# EAGLE board rx_out (EAGLE 7.6.0)
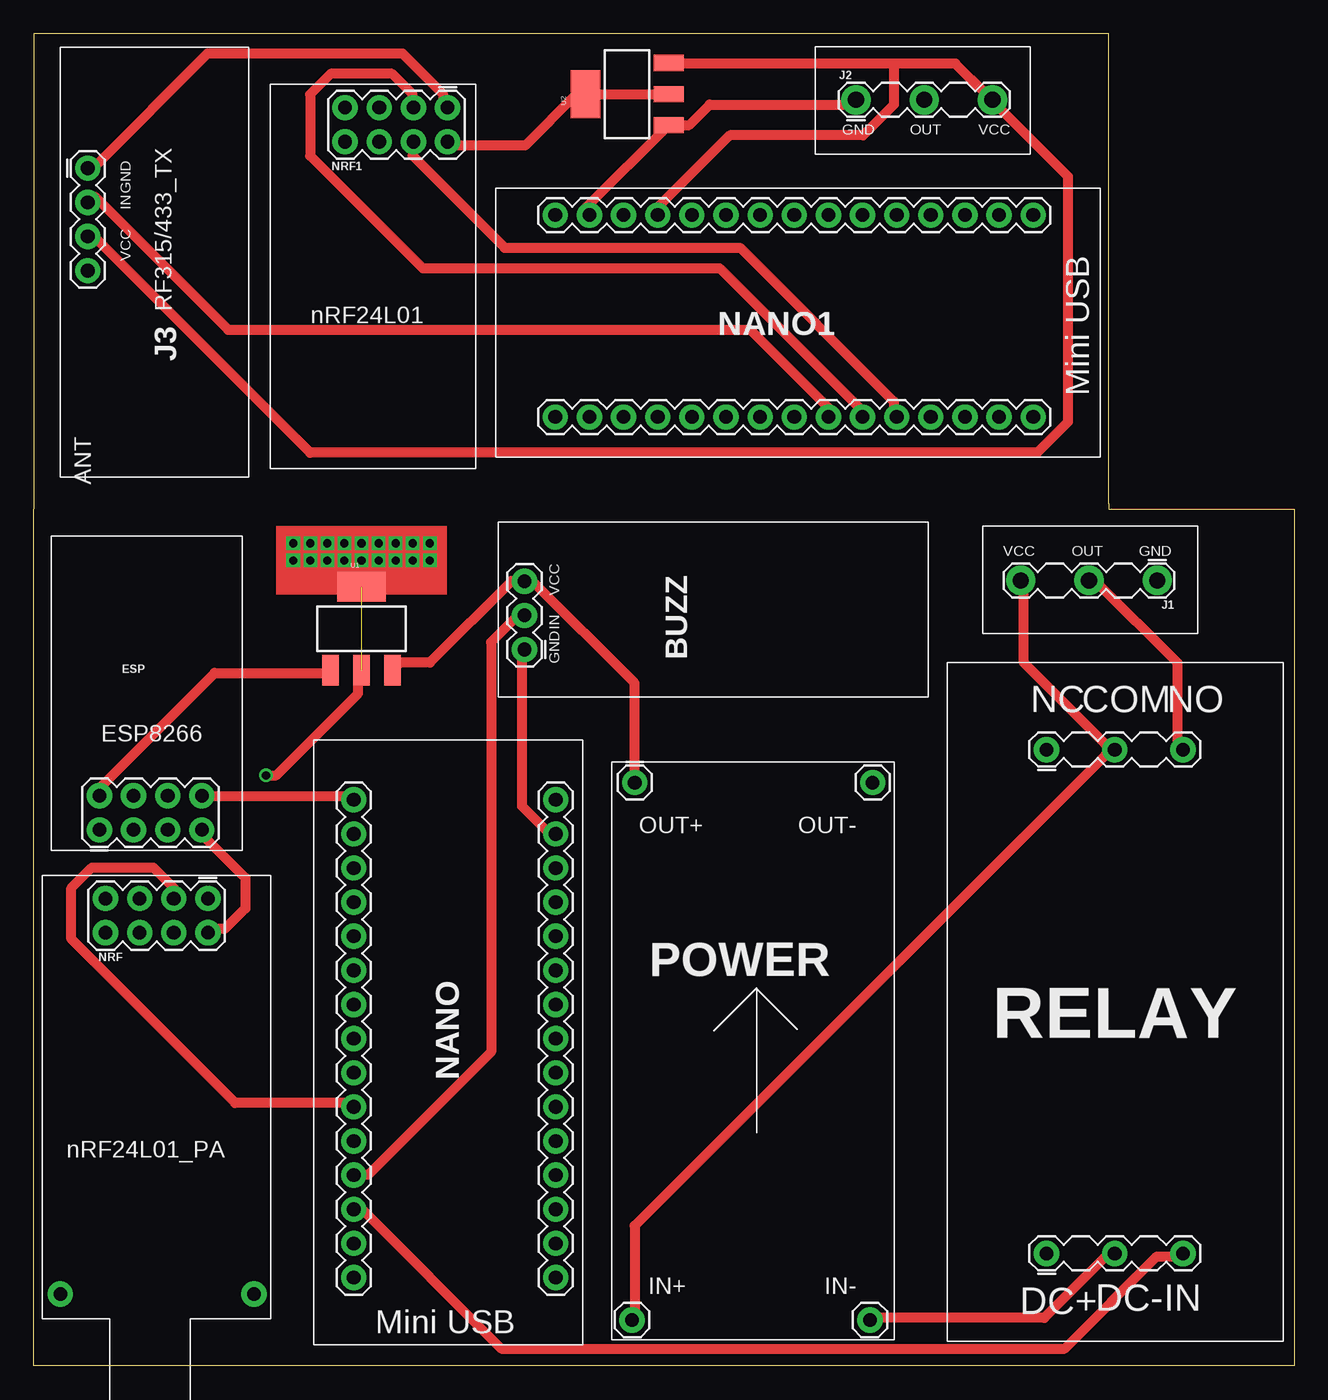
[diagram p0: board, top side]
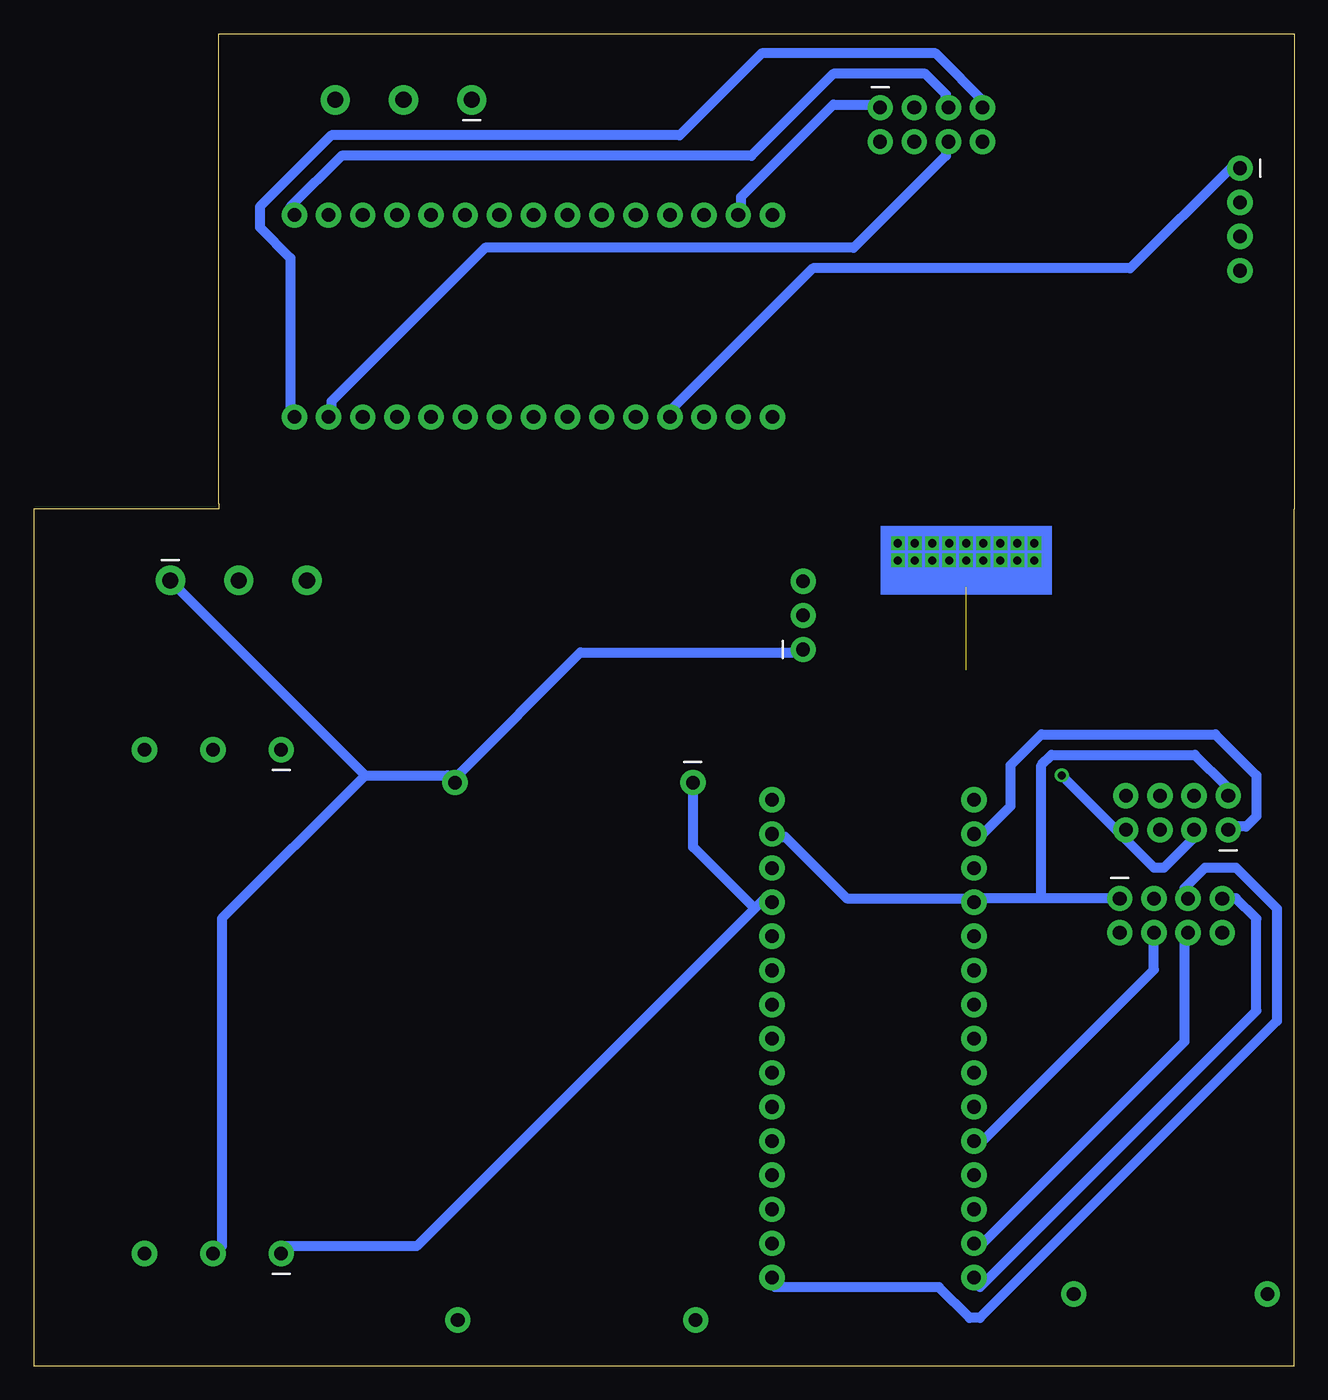
[diagram p1: board, bottom side, seen from below]

Size 93.79 x 99.17 mm. Coordinates in mm from the lower left corner, seen from the top.
Outline: 0,0 0,63.77 0,64.17 0,99.17 80,99.17 80,64.17 80,63.77 93.79,63.77 93.79,0 0,0
Copper layers (1*16): Top 0.035mm / dielectric 1.5mm / Bottom 0.035mm
Design rules "default": minimum track width 10mil, minimum drill 24mil, track to track 8mil, track to pad 8mil, pad to pad 8mil, via to via 8mil, smd to smd 8mil, copper to edge 40mil, drill to drill 8mil, minimum pad ring 10mil, minimum via ring 8mil, stop-mask expansion 4mil, vias tented up to drill 0mil, thermal gap 10mil

## Footprints (pad centres in the part's own frame; a part is rotated, then mirrored left to right if it is on the bottom)
BUZZ_MODULE = drill 1.016 pad 1.88: 1 3.52,-1.97; 3 6.06,-1.97; 5 8.6,-1.97
ESP8266 = drill 1.016 pad 1.88: 1 -10.61,1.53; 2 -10.61,4.07; 3 -8.07,1.53; 4 -8.07,4.07; 5 -5.53,1.53; 6 -5.53,4.07; 7 -2.99,1.53; 8 -2.99,4.07
OUT_HEAD_3_BIG = drill 1.2 pad 2.184: 1 3.02,4.03; 3 8.1,4.03; 5 13.18,4.03
315MHZ_TX = drill 1.016 pad 1.88: 1 9.02,2.03; 3 11.56,2.03; 5 14.1,2.03; 7 16.64,2.03
ARDUINO_NANO = drill 1.016 pad 1.88: 1 -10.2,-8.1; 2 -7.66,-8.1; 3 -5.12,-8.1; 4 -2.58,-8.1; 5 -0.04,-8.1; 6 2.5,-8.1; 7 5.04,-8.1; 8 7.58,-8.1; 9 10.12,-8.1; 10 12.66,-8.1; 11 15.2,-8.1; 12 17.74,-8.1; 13 20.28,-8.1; 14 22.82,-8.1; 15 25.36,-8.1; 16 -10.2,6.93; 17 -7.66,6.93; 18 -5.12,6.93; 19 -2.58,6.93; 20 -0.04,6.93; 21 2.5,6.93; 22 5.04,6.93; 23 7.58,6.93; 24 10.12,6.93; 25 12.66,6.93; 26 15.2,6.93; 27 17.74,6.93; 28 20.28,6.93; 29 22.82,6.93; 30 25.36,6.93
NRF24L01_PA = drill 1.016 pad 1.88: 1 -3.81,-15.47; 2 -3.81,-12.93; 3 -1.27,-15.47; 4 -1.27,-12.93; 5 1.27,-15.47; 6 1.27,-12.93; 7 3.81,-15.47; 8 3.81,-12.93; 9 7.17,13.97; 10 -7.23,13.97
NRF24L01 = drill 1.016 pad 1.88: 1 -13.21,1.73; 2 -13.21,4.27; 3 -10.67,1.73; 4 -10.67,4.27; 5 -8.13,1.73; 6 -8.13,4.27; 7 -5.59,1.73; 8 -5.59,4.27
POWER_REDUCE = drill 1.016 pad 1.88: 1 10.15,-20.29; 2 -7.55,-20.29; 3 10.35,19.71; 4 -7.35,19.71
RELAY_MODULE = drill 1.016 pad 1.88: 1 -4.91,-22.38; 2 0.17,-22.38; 3 5.25,-22.38; 4 -4.91,15.12; 5 0.17,15.12; 6 5.25,15.12
SOT223 = smd 1.219 x 2.235: 1 -2.311,-3.099; 2 0,-3.099; 3 2.311,-3.099 | smd 3.6 x 2.2: 4 0,3.099

## Placement (x,y rotation side)
BUZZ  [BUZZ_MODULE]  34.56,49.8 90 top
ESP  [ESP8266]  15.51,38.37 0 top
J1  [OUT_HEAD_3_BIG]  86.63,62.5 180 top
J2  [OUT_HEAD_3_BIG]  58.17,90.21 0 top
J3  [315MHZ_TX]  2,98.17 270 top
NANO  [ARDUINO_NANO]  30.75,16.78 90 top
NANO1  [ARDUINO_NANO]  64.18,77.56 180 top
NRF  [NRF24L01_PA]  9.16,19.32 180 top
NRF1  [NRF24L01]  17.59,95.39 180 top
POWER  [POWER_REDUCE]  54.88,23.13 180 top
RELAY  [RELAY_MODULE]  80.28,30.75 0 top
U1  [SOT223]  24.4,54.88 0 top
U2  [SOT223]  44.15,94.66 90 top

## Library data of the parts
BUZZ ESP J1-J3 NANO NANO1 NRF NRF1 POWER RELAY = rx
U1 U2 = rx; PROD_ID: VREG-08170

## Nets
+3.3V: ESP.3 ESP.7 NRF.2 U1.2 U1.4
+3.3V1: NRF1.2 U2.2 U2.4
+5V: BUZZ.5 NANO.12 POWER.1 RELAY.1 U1.3
+5V1: J2.5 J3.5 NANO1.12 U2.3
+12V: J1.5 POWER.3 RELAY.5
D1: NANO1.17 NRF1.6
D2: NANO1.20 NRF1.4
D3: NANO1.1 NRF1.5
D4: NANO1.21 NRF1.3
D5: NANO1.16 NRF1.7
D6: NANO1.18
D7: NANO.21 NRF.3
D8: NANO.20 NRF.4
D9: BUZZ.3 NANO.19
D10: NANO.18 RELAY.3
D11: NANO.17 NRF.6
D12: NANO.16 NRF.7
D13: NANO.1 NRF.5
D14: NANO1.19
D15: J3.3 NANO1.22
GND: BUZZ.1 ESP.2 J1.1 NANO.14 NANO.27 NRF.1 POWER.2 POWER.4 RELAY.2 U1.1
GND1: J2.1 J3.1 NANO1.14 NANO1.27 NRF1.1 U2.1
NANO_RX: ESP.1 NANO.29
NANO_RX1: NANO1.29
NANO_TX: ESP.8 NANO.30
NANO_TX1: NANO1.30
OUT: J1.3 RELAY.6
OUT1: J2.3

## Tracks (layer width: path | path; a pad name or v marks a point on that pad's centre or on a via)
+3.3V  (via drill 0.61)  (1 unrouted)
  Top 0.762: v17.29,43.96 18.05,43.96 24.15,50.05 24.15,51.58 U1.2 | NRF.2 13.48,32.53 14.24,32.53 15.76,34.05 15.76,36.34 12.72,39.39 ESP.7
  Bottom 0.762: 12.72,39.39 v17.29,43.96 | 12.72,39.39 10.43,37.1 9.67,37.1 7.38,39.39 ESP.3 | 12.72,39.39 ESP.7
+3.3V1
  Top 0.762: U2.2 41.15,94.65 U2.4 40.39,94.65 36.58,90.84 31.24,90.84 NRF1.2
+5V
  Top 0.762: U1.3 27.19,52.34 29.48,52.34 35.58,58.44 36.34,58.44 BUZZ.5 37.1,58.44 44.72,50.82 44.72,43.96 POWER.1
  Bottom 0.762: 40.15,34.05 39.39,34.81 NANO.12 | 40.15,34.05 65.29,8.91 75.2,8.91 RELAY.1 | 40.15,34.05 44.72,38.62 44.72,43.2 POWER.1
+5V1
  Top 0.762: 64.01,96.94 68.58,96.94 70.87,94.65 J2.5 71.63,93.89 76.96,88.55 76.96,70.27 74.68,67.98 20.57,67.98 4.57,83.98 J3.5 | 64.01,96.94 48.01,96.94 U2.3 | 64.01,96.94 64.01,93.89 61.72,91.6 51.82,91.6 46.48,86.27 NANO1.12
+12V
  Top 0.762: POWER.3 44.72,3.57 44.72,10.43 79.77,45.48 RELAY.5 79.77,46.24 73.68,52.34 73.68,58.44 J1.5
D1
  Bottom 0.762: NANO1.17 71.63,71.03 71.63,71.79 60.2,83.22 32.77,83.22 25.91,90.08 25.91,90.84 NRF1.6
D2
  Top 0.762: NANO1.20 64.01,71.03 64.01,71.79 52.58,83.22 35.05,83.22 28.19,90.08 28.19,90.84 NRF1.4
D3
  Bottom 0.762: NANO1.1 74.68,86.27 70.87,90.08 40.39,90.08 34.29,96.17 27.43,96.17 25.91,94.65 25.91,93.89 NRF1.5
D4
  Top 0.762: NANO1.21 61.72,71.03 51.05,81.7 28.96,81.7 20.57,90.08 20.57,94.65 22.1,96.17 26.67,96.17 28.19,94.65 28.19,93.89 NRF1.3
D5
  Bottom 0.762: NANO1.16 74.68,71.03 74.68,82.46 76.96,84.74 76.96,86.27 71.63,91.6 45.72,91.6 39.62,97.7 26.67,97.7 22.86,93.89 NRF1.7
D7
  Top 0.762: NRF.3 10.43,35.58 8.91,37.1 4.33,37.1 2.81,35.58 2.81,31.77 15,19.57 23.38,19.57 NANO.21
D8
  Bottom 0.762: NRF.4 10.43,29.48 23.38,16.53 NANO.20
D9
  Top 0.762: NANO.19 24.15,14.24 24.91,14.24 34.05,23.38 34.05,53.86 36.34,56.15 BUZZ.3
D10
  Top 0.762: RELAY.3 85.11,8.14 83.58,8.14 76.72,1.29 34.81,1.29 24.15,11.95 NANO.18
D11
  Bottom 0.762: NRF.6 8.14,31.77 8.14,24.15 23.38,8.91 NANO.17
D12
  Bottom 0.762: NRF.7 5.1,34.81 4.33,34.81 2.81,33.29 2.81,26.43 23.38,5.86 NANO.16
D13
  Bottom 0.762: NANO.1 38.62,5.86 26.43,5.86 24.15,3.57 23.38,3.57 1.29,25.67 1.29,34.05 4.33,37.1 6.62,37.1 8.14,35.58 8.14,34.81 NRF.5
D15
  Top 0.762: NANO1.22 59.44,71.03 53.34,77.12 14.48,77.12 4.57,87.03 J3.3
GND
  Top 0.762: U1.1 21.86,51.58 13.48,51.58 5.1,43.2 ESP.2 | NANO.14 38.62,39.39 36.34,41.67 36.34,53.1 BUZZ.1 | POWER.4 62.25,3.57 75.2,3.57 79.77,8.14 RELAY.2
  Bottom 0.762: 18.81,34.81 13.48,34.81 NRF.1 | 18.81,34.81 23.38,34.81 NANO.27 24.15,34.81 33.29,34.81 37.86,39.39 38.62,39.39 NANO.14 | 18.81,34.81 18.81,44.72 18.05,45.48 7.38,45.48 5.1,43.2 ESP.2 | 69.1,43.96 63.01,43.96 POWER.2 62.25,43.96 53.1,53.1 37.1,53.1 BUZZ.1 | 69.1,43.96 83.58,58.44 J1.1 | 69.1,43.96 79.77,33.29 79.77,8.91 RELAY.2
GND1
  Top 0.762: NANO1.14 41.15,86.27 47.24,92.36 U2.1 48.01,92.36 48.77,92.36 50.29,93.89 60.96,93.89 J2.1 | NRF1.1 30.48,93.89 30.48,94.65 27.43,97.7 12.95,97.7 4.57,89.32 J3.1
  Bottom 0.762: NRF1.1 31.24,93.89 34.29,93.89 41.15,87.03 41.15,86.27 NANO1.14 | NANO1.27 46.48,71.03 35.81,81.7 12.19,81.7 4.57,89.32 J3.1
N$1  (via drill 0.6)
  other vias: 19.32,61.23
N$2  (via drill 0.6)
  other vias: 20.59,61.23
N$3  (via drill 0.6)
  other vias: 21.86,61.23
N$4  (via drill 0.6)
  other vias: 23.13,61.23
N$5  (via drill 0.6)
  other vias: 24.4,61.23
N$6  (via drill 0.6)
  other vias: 25.67,61.23
N$7  (via drill 0.6)
  other vias: 26.94,61.23
N$8  (via drill 0.6)
  other vias: 28.21,61.23
N$9  (via drill 0.6)
  other vias: 29.48,61.23
N$10  (via drill 0.6)
  other vias: 29.48,59.96
N$11  (via drill 0.6)
  other vias: 28.21,59.96
N$12  (via drill 0.6)
  other vias: 26.94,59.96
N$13  (via drill 0.6)
  other vias: 25.67,59.96
N$14  (via drill 0.6)
  other vias: 24.4,59.96
N$15  (via drill 0.6)
  other vias: 23.13,59.96
N$16  (via drill 0.6)
  other vias: 21.86,59.96
N$17  (via drill 0.6)
  other vias: 20.59,59.96
N$18  (via drill 0.6)
  other vias: 19.32,59.96
NANO_RX
  Bottom 0.762: ESP.1 4.33,40.15 3.57,40.15 2.81,40.91 2.81,43.96 5.86,47.01 18.81,47.01 21.1,44.72 21.1,41.67 23.38,39.39 NANO.29
NANO_TX
  Top 0.762: NANO.30 23.38,42.43 12.72,42.43 ESP.8
OUT
  Top 0.762: RELAY.6 85.11,46.24 85.11,52.34 79.01,58.44 J1.3
(copper drawn outside any net)
  shapes: Bottom area x1, Top area x1